# Altium PCB PCB2.PcbDoc (part 2 of 2)
Units mm, origin at the board's own origin, x right, y up, seen from the top; angles counter-clockwise.
Board outline 247 x 102 mm, 2 copper layers (Top Layer, Bottom Layer); 201 components, 195 nets, 868 pads, 143 vias.
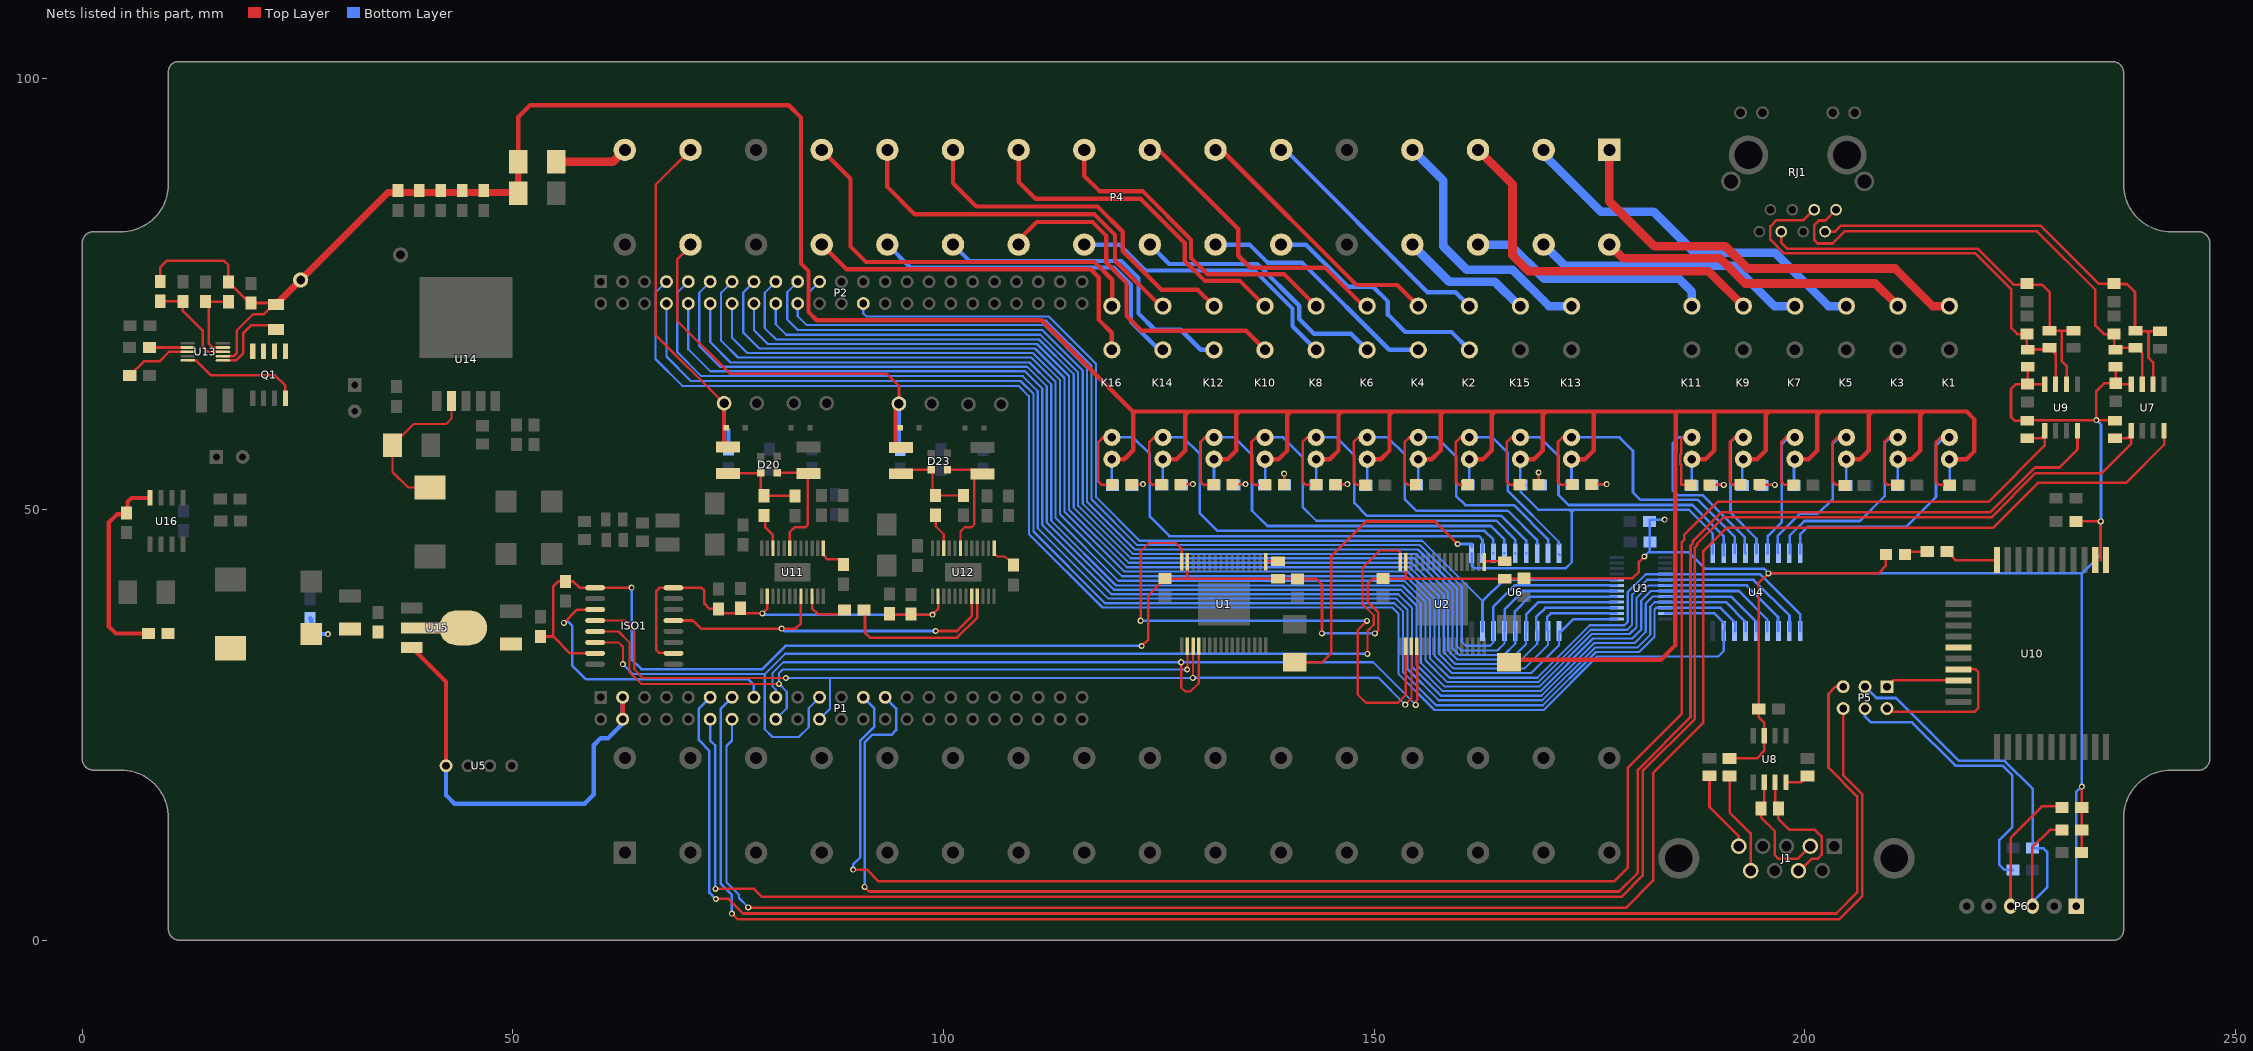
[diagram p2: the nets of this part, all layers, seen from the top]

## Via types
v1: diameter 0.7, hole 0.4, Top Layer to Bottom Layer, 143 vias

## Nets (pads, with @x,y where several pads share a name; then routed paths per layer and width w, separated by ;. In a path a pad name is that pad's centre, name@x,y a point inside that pad or via, vN(x,y) a via of type N, cw(c..) or ccw(c..) an arc to the next point about the centre after c; other vN are vias at no path point) (continued)
NetD10_1: D10.1 R10.1 | length 2.6
  Top Layer w0.3: D10.1@145.503,52.887 145.566,52.95 v1(146.89,52.95)
  Bottom Layer w0.3: R10.1@145.73,52.82 145.86,52.95 v1(146.89,52.95)
NetD11_1: D11.1 R11.2 | length 3.3
  Top Layer w0.3: D11.1@194.733,52.887 194.76,52.86 v1(196.51,52.86)
  Bottom Layer w0.3: R11.2@195.016,52.81 195.066,52.86 v1(196.51,52.86)
NetD12_1: D12.1 R12.1 | length 2.8
  Top Layer w0.3: D12.1@139.503,52.907 139.546,52.95 139.53,52.966 v1(139.53,54.17)
  Bottom Layer w0.3: v1(139.53,54.17) 139.53,52.89 R12.1@139.58,52.84 R12.1@139.69,52.95
NetD13_1: D13.1 R13.2 | length 3.1
  Top Layer w0.3: D13.1@188.903,52.867 188.91,52.86 v1(190.58,52.86)
  Bottom Layer w0.3: R13.2@189.146,52.81 189.196,52.86 v1(190.58,52.86)
NetD14_1: D14.1 R14.1 | length 2.9
  Top Layer w0.3: D14.1@133.553,52.907 133.596,52.95 v1(135.05,52.95)
  Bottom Layer w0.3: R14.1@133.69,52.83 133.81,52.95 v1(135.05,52.95)
NetD15_1: D15.1 R15.2 | length 3.5
  Top Layer w0.3: D15.1@175.243,52.907 175.286,52.95 v1(176.99,52.95)
  Bottom Layer w0.3: R15.2@175.276,52.88 175.346,52.95 v1(176.99,52.95)
NetD16_1: D16.1 R16.1 | length 2.6
  Top Layer w0.3: D16.1@127.503,52.927 127.526,52.95 v1(128.94,52.95)
  Bottom Layer w0.3: R16.1@127.81,52.8 127.96,52.95 v1(128.94,52.95)
NetD17_1: D17.1 R17.2 | length 3.2
  Top Layer w0.3: v1(169.08,54.3) 169.08,52.91 D17.1@169.083,52.907 D17.1@169.126,52.95
  Bottom Layer w0.3: v1(169.08,54.3) 169.08,53.046 R17.2@169.296,52.83 R17.2@169.416,52.95
NetD18_1: D18.1 R18.1 | length 2.7
  Top Layer w0.3: D18.1@121.843,52.907 121.886,52.95 v1(123.15,52.95) ; D18.1@121.863,52.87 D18.1@121.863,52.907
  Bottom Layer w0.3: R18.1@121.86,52.82 121.86,52.87 121.94,52.95 v1(123.15,52.95)
NetD19_2: D19.2 R35.2 | length 3
  Top Layer w0.3: D19.2@211.46,44.5 212.07,45.11 R35.2@214.204,45.11
NetD20_2: D20.2 FB1.1 R36.2 R37.2 | length 10.3
  Top Layer w0.3: FB1.1@74.98,54.206 78.716,54.206 D20.2@78.78,54.27 78.78,51.966 R36.2@79.15,51.596 82.72,51.596 R37.2@82.75,51.566
NetD20_3: D20.3 R40.1 U11.19 | length 14
  Top Layer w0.3: D20.3@80.68,54.27 84.236,54.27 R40.1@84.3,54.206 84.25,54.156 84.25,48.24 83.95,47.94 82.71,47.94 82.135,47.365 U11.19@82.135,45.506
NetD23_2: D23.2 FB2.1 R41.2 R42.2 | length 10.4
  Top Layer w0.254: FB2.1@95.05,54.156 95.524,54.63 D23.2@98.56,54.63 98.73,54.46 98.73,51.626 R42.2@102.31,51.626
NetD23_3: D23.3 R44.1 U12.19 | length 14.3
  Top Layer w0.254: D23.3@100.46,54.63 104.006,54.63 R44.1@104.5,54.136 ; U12.19@101.965,45.506 101.965,47.455 102.45,47.94 103.24,47.94 103.55,48.25 103.55,53.58 R44.1@104.17,54.2
NetD28_2: D28.2 L2.1 U14.2 | length 18.4
  Top Layer w0.254: L2.1@40.37,52.55 37.83,52.55 36.02,54.36 D28.2@36.02,57.48 38.48,59.94 42.27,59.94 42.855,60.525 U14.2@42.855,62.599
NetJ1_2: J1.2 R24.2 U8.6 | length 14.2
  Top Layer w0.3: U8.6@195.276,18.33 195.276,15.642 R24.2@194.914,15.28 194.914,14.246 196.5,12.66 196.5,9.89 196.95,9.44 199.156,9.44 J1.2@200.636,10.92
NetJ1_5: J1.5 R26.2 | length 9.6
  Top Layer w0.3: R26.2@188.91,19.094 188.92,19.084 188.92,15.44 192.326,12.034 J1.5@192.326,10.92
NetJ1_7: J1.7 R24.1 U8.7 | length 15.9
  Top Layer w0.3: U8.7@196.546,18.33 196.546,15.628 R24.1@196.92,15.254 ; R24.1@196.946,15.28 R24.1@196.92,15.254 ; J1.7@199.251,8.08 199.42,8.08 200.78,9.44 201.46,9.44 201.94,9.92 201.94,12.05 201.19,12.8 198.2,12.8 196.92,14.08 R24.1@196.92,15.254
NetJ1_9: J1.9 R25.1 | length 12
  Top Layer w0.3: R25.1@191.26,19.084 191.26,14.85 193.711,12.399 J1.9@193.711,8.08
NetQ1_4: Q1.4 U13.10 | length 14
  Top Layer w0.3: U13.10@12.23,67.31 13.21,67.31 14.94,65.58 22.4,65.58 23.58,64.4 23.58,62.964 Q1.4@23.594,62.95
NetR1_2: R1.2 U1.17 | length 1.5
  Top Layer w0.3: U1.17@137.41,43.93 137.46,43.98 R1.2@138.84,43.98
NetR2_2: R2.2 U2.17 | length 2.4
  Top Layer w0.3: U2.17@162.76,43.91 162.83,43.98 R2.2@165.15,43.98
NetR20_1: R20.1 U8.8 | length 2.8
  Top Layer w0.3: U8.8@197.816,18.33 199.546,18.33 R20.1@200.3,19.084
NetR35_1: R35.1 U10.11 | length 6.2
  Top Layer w0.3: R35.1@216.49,45.11 217.466,44.134 U10.11@222.28,44.134
NetR36_1: R36.1 U11.22 | length 4.2
  Top Layer w0.3: R36.1@79.15,49.31 79.29,49.17 79.29,47.95 80.184,47.056 U11.22@80.184,45.506
NetR39_2: R39.2 U11.13 | length 3.3
  Top Layer w0.3: U11.13@86.036,45.506 86.036,44.704 86.49,44.25 87.82,44.25 R39.2@88.2,43.87
NetR41_1: R41.1 U12.22 | length 4.2
  Top Layer w0.254: R41.1@99.04,49.34 99.1,49.28 99.1,48.06 100.014,47.146 U12.22@100.014,45.506
NetR43_2: R43.2 U12.13 | length 3.4
  Top Layer w0.254: U12.13@105.866,45.506 105.866,44.924 106.23,44.56 107.096,44.56 R43.2@108.11,43.546
NetR46_1: R46.1 R49.2 U13.4 | length 9.3
  Top Layer w0.3: R49.2@14.28,74.154 14.69,73.744 14.69,69.25 15.13,68.81 U13.4@16.33,68.81 ; R49.2@14.56,74.05 14.64,74.13 R46.1@16.96,74.13
NetR47_1: R47.1 R50.2 U13.3 | length 11.4
  Top Layer w0.3: R47.1@9.05,74.18 9.066,74.164 R50.2@11.68,74.164 11.68,73.05 13.99,70.74 13.99,68.9 14.58,68.31 U13.3@16.33,68.31
NetR48_2: R48.2 U13.8 | length 7.9
  Top Layer w0.3: R48.2@5.504,65.56 7.154,67.21 8.94,67.21 10.04,68.31 U13.8@12.23,68.31
NetR51_2: R51.2 U13.7 | length 4.4
  Top Layer w0.3: R51.2@7.786,68.81 U13.7@12.23,68.81
NetR54_1: R54.1 R55.1 U16.4 | length 23.7
  Top Layer w0.5: R54.1@7.68,35.6 3.9,35.6 3.08,36.42 3.08,48.49 4.03,49.44 4.98,49.44 5.26,49.72 5.26,50.89 5.72,51.35 U16.4@7.876,51.35
NetU1_32: U1.32 U2.2 | length 62.3
  Top Layer w0.254: v1@122.87,37.1 v1@122.89,37.12 ; v1@122.89,37.16 122.89,45.17 123.82,46.1 126.99,46.1 127.66,45.43 U1.32@127.66,43.93 ; v1(149.157,37.087) 148.09,36.02 148.09,28.51 149.04,27.56 152.75,27.56 153.66,28.47 U2.2@153.66,34.11
  Bottom Layer w0.254: v1@122.87,37.1 122.883,37.087 v1(149.157,37.087)
  other v1: 122.87,37.09
O5V_ISO: C20.1 C21.1 C31.1 C32.1 ISO1.10 ISO1.16 U11.2 U12.2 | length 53.1
  Top Layer w0.3: ISO1.10@68.64,33.305 68.595,33.35 66.98,33.35 66.65,33.68 66.65,40.54 67.02,40.91 ISO1.16@68.655,40.91 ; ISO1.16@68.64,40.925 ISO1.16@68.655,40.91 ; U11.2@79.532,39.944 79.532,38.522 v1(78.96,37.95) 74.38,37.95 C21.1@73.86,38.47 72.84,38.47 72.23,39.08 72.23,40.599 71.919,40.91 70.97,40.91 ISO1.16@68.655,40.91 ; C31.1@93.72,37.9 93.82,37.8 v1(98.71,37.8) 99.362,38.452 U12.2@99.362,39.944
  Bottom Layer w0.3: v1(78.96,37.95) 79.11,37.8 v1(98.71,37.8)
OUT_C\S\: ISO1.3 P1.15 | length 33.5
  Top Layer w0.3: v1(55.92,36.85) 57.455,38.385 ISO1.3@59.54,38.385
  Bottom Layer w0.3: v1(55.92,36.85) 56.03,36.96 56.43,36.96 56.91,36.48 56.91,31.86 58.45,30.32 77.3,30.32 77.978,29.642 P1.15@77.978,28.198
OUT_PIN0: K1.1 P4.1 | length 50.5
  Top Layer w1: P4.1@177.292,91.76 177.292,85.788 182.5,80.58 190.76,80.58 193.36,77.98 210.47,77.98 214.828,73.622 K1.1@216.774,73.622
OUT_PIN1: K3.1 P4.2 | length 36.5
  Top Layer w1: P4.2@177.292,80.76 178.862,79.19 190.12,79.19 193.06,76.25 208.167,76.25 K3.1@210.795,73.622
OUT_PIN2: K5.1 P4.3 | length 43
  Bottom Layer w1: P4.3@169.672,91.76 169.672,91.228 176.32,84.58 182.44,84.58 187.2,79.82 196.54,79.82 202.738,73.622 K5.1@204.816,73.622
OUT_PIN3: K7.1 P4.4 | length 32.1
  Bottom Layer w1: P4.4@169.672,80.76 172.112,78.32 191.75,78.32 196.448,73.622 K7.1@198.837,73.622
OUT_PIN4: K9.1 P4.5 | length 43.1
  Top Layer w1: P4.5@162.052,91.76 166.05,87.762 166.05,79.53 167.9,77.68 188.801,77.68 K9.1@192.859,73.622
OUT_PIN5: K11.1 P4.6 | length 28.8
  Bottom Layer w1: P4.6@162.052,80.76 165.77,80.76 169.73,76.8 185.37,76.8 186.88,75.29 K11.1@186.88,73.622
OUT_PIN6: K13.1 P4.7 | length 30.4
  Bottom Layer w1: P4.7@154.432,91.76 158,88.192 158,80.58 160.74,77.84 166.06,77.84 170.278,73.622 K13.1@172.898,73.622
OUT_PIN7: K15.1 P4.8 | length 15.7
  Bottom Layer w1: P4.8@154.25,80.92 158.71,76.46 164,76.46 166.838,73.622 K15.1@166.969,73.622
OUT_PIN8: K2.1 P4.11 | length 30.6
  Bottom Layer w0.5: P4.11@138.47,91.67 139.75,91.67 156.19,75.23 159.431,75.23 K2.1@161.039,73.622 ; P4.11@139.192,91.76 P4.11@139.7,91.76
OUT_PIN9: K2.2 P4.12 | length 27.8
  Bottom Layer w0.5: P4.12@139.192,80.76 142.04,80.76 146.93,75.87 149.86,75.87 151.58,74.15 151.58,72.63 153.6,70.61 158.971,70.61 K2.2@161.039,68.542
OUT_PIN10: K4.1 P4.13 | length 31.1
  Top Layer w0.5: P4.13@131.572,91.76 131.852,91.48 132.52,91.48 147.93,76.07 152.662,76.07 K4.1@155.11,73.622
OUT_PIN11: K4.2 P4.14 | length 28.6
  Bottom Layer w0.5: P4.14@131.572,80.76 135.53,80.76 137.62,78.67 141.61,78.67 151.738,68.542 K4.2@155.11,68.542
OUT_PIN12: K6.1 P4.15 | length 34.6
  Top Layer w0.5: P4.15@123.952,91.76 125.02,91.76 134.22,82.56 134.22,79.47 135.602,78.088 144.272,78.088 148.738,73.622 K6.1@149.18,73.622
OUT_PIN13: K6.2 P4.16 | length 31.2
  Bottom Layer w0.5: P4.16@123.952,80.76 126.198,78.514 136.456,78.514 141.3,73.67 141.3,72.13 143.01,70.42 147.302,70.42 K6.2@149.18,68.542
OUT_PIN14: K8.1 P4.17 | length 37.4
  Top Layer w0.5: P4.17@116.332,91.76 116.332,88.728 118.09,86.97 123.08,86.97 128.73,81.32 128.73,79.206 130.602,77.334 139.539,77.334 K8.1@143.251,73.622
OUT_PIN15: K8.2 P4.18 | length 33.2
  Bottom Layer w0.5: P4.18@116.332,80.76 120.43,80.76 123.43,77.76 136.11,77.76 140.52,73.35 140.52,71.273 K8.2@143.251,68.542
OUT_PIN16: K10.1 P4.19 | length 39.5
  Top Layer w0.5: P4.19@108.712,91.76 108.712,88.068 110.71,86.07 122.88,86.07 128.01,80.94 128.01,78.86 130.29,76.58 134.363,76.58 K10.1@137.321,73.622
OUT_PIN17: K10.2 P4.20 | length 40.2
  Top Layer w0.5: P4.20@108.712,80.76 108.712,81.282 110.82,83.39 117.28,83.39 118.9,81.77 118.9,78.65 121.24,76.31 121.24,72.5 122.99,70.75 135.113,70.75 K10.2@137.321,68.542
OUT_PIN18: K12.1 P4.21 | length 41.6
  Top Layer w0.5: P4.21@101.092,91.76 101.092,87.878 103.796,85.174 117.876,85.174 120.8,82.25 120.8,80.02 125.3,75.52 129.494,75.52 K12.1@131.392,73.622 131.508,73.622 K12.1@131.59,73.54
OUT_PIN19: K12.2 P4.22 | length 37.8
  Bottom Layer w0.5: P4.22@101.092,80.76 102.998,78.854 120.666,78.854 122.63,76.89 122.63,72.76 124.52,70.87 127.53,70.87 129.858,68.542 K12.2@131.392,68.542
OUT_PIN20: K14.1 P4.23 | length 43.8
  Top Layer w0.5: P4.23@93.472,91.76 93.472,87.458 96.66,84.27 117.53,84.27 119.91,81.89 119.91,78.88 125.168,73.622 K14.1@125.462,73.622
OUT_PIN21: K14.2 P4.24 | length 39.6
  Bottom Layer w0.5: P4.24@93.472,80.76 96.132,78.1 119.76,78.1 121.76,76.1 121.76,71.78 124.998,68.542 K14.2@125.462,68.542
OUT_PIN22: K16.1 P4.25 | length 47.7
  Top Layer w0.5: P4.25@85.852,91.76 89.2,88.412 89.2,80.54 91,78.74 117.53,78.74 119.58,76.69 119.58,73.669 K16.1@119.533,73.622
OUT_PIN23: K16.2 P4.26 | length 42.8
  Top Layer w0.5: P4.26@85.852,80.76 88.722,77.89 117.09,77.89 118,76.98 118,72.06 119.533,70.527 K16.2@119.533,68.542
OUT_SIG0: D4.2 K1.3 U4.18 | length 35.6
  Top Layer w0.3: D4.2@216.588,52.867 215.577,52.867 215.204,53.24 215.204,57.85 215.734,58.38 K1.3@216.772,58.38
  Bottom Layer w0.3: U4.18@199.46,44.921 199.45,44.931 199.45,47.13 200.34,48.02 211.78,48.02 215.22,51.46 215.22,57.46 216.142,58.382 K1.3@216.774,58.382
OUT_SIG1: D5.2 K3.3 U4.17 | length 30.9
  Top Layer w0.3: D5.2@210.609,52.867 209.598,52.867 209.225,53.24 209.225,57.85 209.755,58.38 K3.3@210.793,58.38
  Bottom Layer w0.3: U4.17@198.19,44.921 198.24,44.971 198.24,46.97 199.94,48.67 206.37,48.67 209.27,51.57 209.27,57.7 209.952,58.382 K3.3@210.795,58.382
OUT_SIG2: D7.2 K5.3 U4.16 | length 26.5
  Top Layer w0.3: D7.2@204.63,52.867 203.62,52.867 203.247,53.24 203.247,57.85 203.777,58.38 K5.3@204.814,58.38
  Bottom Layer w0.3: U4.16@196.92,44.921 196.87,44.971 196.87,46.97 199.39,49.49 201.49,49.49 203.25,51.25 203.25,57.69 203.942,58.382 K5.3@204.816,58.382
OUT_SIG3: D9.2 K7.3 U4.15 | length 23.1
  Top Layer w0.3: D9.2@198.651,52.867 197.641,52.867 197.268,53.24 197.268,57.85 197.798,58.38 K7.3@198.835,58.38
  Bottom Layer w0.3: U4.15@195.65,44.921 195.7,44.971 195.7,46.94 197.33,48.57 197.33,57.59 198.122,58.382 K7.3@198.837,58.382
OUT_SIG4: D11.2 K9.3 U4.14 | length 23.8
  Top Layer w0.3: D11.2@192.672,52.867 191.662,52.867 191.289,53.24 191.289,57.85 191.819,58.38 K9.3@192.857,58.38
  Bottom Layer w0.3: K9.3@192.859,58.382 191.902,58.382 191.36,57.84 191.36,49.63 194.38,46.61 U4.14@194.38,44.921
OUT_SIG5: D13.2 K11.3 U4.13 | length 28.2
  Top Layer w0.3: D13.2@186.693,52.867 185.683,52.867 185.62,52.93 185.62,55.192 185.53,55.283 185.53,56.401 185.62,56.492 185.62,58.16 185.84,58.38 186.878,58.38 K11.3@186.88,58.382
  Bottom Layer w0.3: K11.3@186.88,58.382 185.342,58.382 184.65,57.69 184.65,52.22 185.19,51.68 188.09,51.68 193.04,46.73 193.04,44.991 U4.13@193.11,44.921
OUT_SIG6: D15.2 K13.3 U4.12 | length 36.4
  Top Layer w0.3: D15.2@172.714,52.869 171.703,52.869 171.33,53.242 171.33,57.852 171.86,58.382 K13.3@172.898,58.382
  Bottom Layer w0.3: K13.3@172.898,58.382 178.478,58.382 180.04,56.82 180.04,51.99 180.91,51.12 187.57,51.12 191.86,46.83 191.86,44.941 U4.12@191.84,44.921
OUT_SIG7: D17.2 K15.3 U4.11 | length 41.2
  Top Layer w0.3: D17.2@166.784,52.869 165.774,52.869 165.401,53.242 165.401,57.852 165.931,58.382 K15.3@166.969,58.382
  Bottom Layer w0.3: K15.3@166.969,58.382 169.248,58.382 171.39,56.24 171.39,51.71 172.57,50.53 186.94,50.53 190.58,46.89 190.58,44.74 U4.11@190.62,44.7
OUT_SIG8: D3.2 K2.3 U6.18 | length 26.3
  Top Layer w0.3: D3.2@160.855,52.869 159.844,52.869 159.471,53.242 159.471,57.852 160.001,58.382 K2.3@161.039,58.382
  Bottom Layer w0.3: K2.3@161.039,58.382 163.718,58.382 165.49,56.61 165.49,52.19 171.42,46.26 ; U6.18@171.43,44.81 U6.18@171.53,44.71 ; U6.18@171.43,45.99 171.43,46.27
OUT_SIG9: D6.2 K4.3 U6.17 | length 31
  Top Layer w0.3: D6.2@154.925,52.869 153.915,52.869 153.542,53.242 153.542,57.852 154.072,58.382 K4.3@155.11,58.382
  Bottom Layer w0.3: K4.3@155.11,58.382 157.288,58.382 159.51,56.16 159.51,51.57 160.57,50.51 166.2,50.51 170.19,46.52 170.19,46.101
OUT_SIG10: D8.2 K6.3 U6.16 | length 36.1
  Top Layer w0.3: D8.2@148.996,52.869 147.986,52.869 147.613,53.242 147.613,57.852 148.143,58.382 K6.3@149.18,58.382
  Bottom Layer w0.3: K6.3@149.18,58.382 151.558,58.382 153.56,56.38 153.56,51.19 154.87,49.88 165.5,49.88 168.92,46.46 U6.16@168.92,46.01
OUT_SIG11: D10.2 K8.3 U6.15 | length 40.8
  Top Layer w0.3: D10.2@143.066,52.869 142.056,52.869 141.683,53.242 141.683,57.852 142.213,58.382 K8.3@143.251,58.382
  Bottom Layer w0.3: K8.3@143.251,58.382 145.598,58.382 147.68,56.3 147.68,50.74 149.12,49.3 164.74,49.3 167.63,46.41 167.63,46.121 ; U6.15@167.63,44.941 U6.15@167.65,44.921
OUT_SIG12: D12.2 K10.3 U6.14 | length 45.7
  Top Layer w0.3: D12.2@137.137,52.869 136.127,52.869 135.754,53.242 135.754,57.852 136.284,58.382 K10.3@137.321,58.382
  Bottom Layer w0.3: K10.3@137.321,58.382 139.418,58.382 141.68,56.12 141.68,50.288 143.268,48.7 164.18,48.7 166.39,46.49 166.39,46.111 ; U6.14@166.38,44.921 U6.14@166.39,44.931
OUT_SIG13: D14.2 K12.3 U6.13 | length 50.8
  Top Layer w0.3: D14.2@131.207,52.869 130.197,52.869 129.824,53.242 129.824,57.852 130.354,58.382 K12.3@131.392,58.382
  Bottom Layer w0.3: K12.3@131.392,58.382 133.778,58.382 135.81,56.35 135.81,49.86 137.58,48.09 163.54,48.09 165.1,46.53 165.1,46.111 ; U6.13@165.1,44.931 U6.13@165.11,44.921
OUT_SIG14: D16.2 K14.3 U6.12 | length 55.7
  Top Layer w0.3: D16.2@125.278,52.869 124.268,52.869 123.895,53.242 123.895,57.852 124.425,58.382 K14.3@125.462,58.382
  Bottom Layer w0.3: K14.3@125.462,58.382 127.818,58.382 129.72,56.48 129.72,49.6 131.8,47.52 162.81,47.52 163.83,46.5 163.83,46.111 ; U6.12@163.83,44.931 U6.12@163.84,44.921
OUT_SIG15: D18.2 K16.3 U6.11 | length 61.7
  Top Layer w0.3: D18.2@119.349,52.869 118.338,52.869 117.965,53.242 117.965,57.852 118.495,58.382 K16.3@119.533,58.382
  Bottom Layer w0.3: K16.3@119.533,58.382 122.008,58.382 123.94,56.45 123.94,49.18 126.21,46.91 162.15,46.91 162.57,46.49 U6.11@162.57,44.921
PA0: P2.14 U3.4 U4.1 | length 168.3
  Bottom Layer w0.254: P2.14@75.438,73.914 75.438,69.952 77.21,68.18 110.35,68.18 113.53,65 113.53,49.43 120.7,42.26 153.68,42.26 156.46,39.48 156.46,32.75 158.73,30.48 168.926,30.48 175.016,36.57 179.06,36.57 179.43,36.94 179.43,40.42 181.505,42.495 U3.4@183.769,42.495
  Bottom Layer w0.3: U3.4@183.769,42.495 194.765,42.495 199.47,37.79 199.47,35.889 U4.1@199.46,35.879
PA1: P2.13 U3.5 U4.2 | length 171.6
  Bottom Layer w0.254: P2.13@75.438,76.454 74.17,75.186 74.17,69.6 76.12,67.65 110.16,67.65 113.01,64.8 113.01,49.01 120.29,41.73 153.49,41.73 155.94,39.28 155.94,32.49 158.47,29.96 169.048,29.96 175.138,36.05 179.38,36.05 179.94,36.61 179.94,40.1 181.685,41.845 U3.5@183.769,41.845
  Bottom Layer w0.3: U3.5@183.769,41.845 194.055,41.845 198.21,37.69 198.21,35.899 U4.2@198.19,35.879
PA2: P2.12 U3.6 U4.3 | length 168.4
  Bottom Layer w0.254: P2.12@72.898,73.914 72.898,69.452 75.27,67.08 109.98,67.08 112.5,64.56 112.5,48.71 120.02,41.19 153.29,41.19 155.41,39.07 155.41,32.21 158.18,29.44 169.17,29.44 175.27,35.54 179.64,35.54 180.46,36.36 180.46,39.77 181.885,41.195 U3.6@183.769,41.195
  Bottom Layer w0.3: U3.6@183.769,41.195 193.225,41.195 196.88,37.54 196.88,35.919 U4.3@196.92,35.879
PA3: P2.11 U3.7 U4.4 | length 171.4
  Bottom Layer w0.254: P2.11@72.898,76.454 71.63,75.186 71.63,68.98 74.04,66.57 109.7,66.57 111.97,64.3 111.97,48.49 119.78,40.68 153.07,40.68 154.9,38.85 154.9,31.98 157.96,28.92 169.292,28.92 175.392,35.02 179.94,35.02 181,36.08 181,39.43 182.115,40.545 U3.7@183.769,40.545
  Bottom Layer w0.3: U3.7@183.769,40.545 192.335,40.545 195.63,37.25 195.63,35.899 U4.4@195.65,35.879
PA4: P2.10 U3.8 U4.5 | length 168.3
  Bottom Layer w0.254: P2.10@70.358,73.914 70.358,68.612 72.92,66.05 109.46,66.05 111.46,64.05 111.46,48.2 119.49,40.17 152.8,40.17 154.38,38.59 154.38,31.76 157.75,28.39 169.404,28.39 175.504,34.49 180.21,34.49 181.52,35.8 181.52,39.09 182.325,39.895 U3.8@183.769,39.895
  Bottom Layer w0.3: U3.8@183.769,39.895 191.435,39.895 194.38,36.95 U4.5@194.38,35.879
PA5: P2.9 U3.9 U4.6 | length 171.5
  Bottom Layer w0.254: P2.9@70.358,76.454 69.07,75.166 69.07,68.3 71.88,65.49 109.2,65.49 110.94,63.75 110.94,47.83 119.11,39.66 152.55,39.66 153.86,38.35 153.86,31.48 157.478,27.862 169.518,27.862 175.626,33.97 180.53,33.97 182.04,35.48 182.04,38.72 182.565,39.245 U3.9@183.769,39.245
  Bottom Layer w0.3: U3.9@183.769,39.245 190.835,39.245 193.12,36.96 193.12,35.889 U4.6@193.11,35.879
PA6: P2.8 U3.10 U4.7 | length 168.6
  Bottom Layer w0.254: P2.8@67.818,73.76 67.818,67.762 70.65,64.93 108.94,64.93 110.43,63.44 110.43,47.44 118.74,39.13 152.34,39.13 153.35,38.12 153.35,31.1 157.17,27.28 169.578,27.28 175.748,33.45 180.78,33.45 182.548,35.218 182.548,38.408 182.735,38.595 U3.10@183.769,38.595
  Bottom Layer w0.3: U3.10@183.769,38.595 190.205,38.595 191.91,36.89 191.91,35.949 U4.7@191.84,35.879
PA7: P2.7 U3.11 U4.8 | length 177.3
  Bottom Layer w0.254: 66.55,75.226 66.55,67.47 69.66,64.36 108.69,64.36 109.9,63.15 109.9,47.17 118.45,38.62 152.08,38.62 152.83,37.87 152.83,30.89 156.99,26.73 169.67,26.73 175.87,32.93 189.93,32.93 190.57,33.57 U4.8@190.57,35.879 ; 66.59,75.226 P2.7@67.818,76.454
  Bottom Layer w0.3: U3.11@183.769,37.945 189.495,37.945 190.68,36.76 190.68,35.989 U4.8@190.57,35.879
PB0: P2.15 U3.13 U6.1 | length 140.9
  Bottom Layer w0.254: P2.15@77.978,76.454 76.73,75.206 76.73,70.55 78.59,68.69 110.62,68.69 114.04,65.27 114.04,49.74 120.98,42.8 153.86,42.8 157,39.66 157,33.01 158.99,31.02 168.23,31.02 171.46,34.25 U6.1@171.46,35.879
  Bottom Layer w0.3: U6.1@171.46,35.59 173.14,37.27 178.106,37.27 U3.13@178.131,37.295
PB1: P2.16 U3.14 U6.2 | length 137.2
  Bottom Layer w0.254: P2.16@77.978,73.914 77.978,70.812 79.57,69.22 110.85,69.22 114.57,65.5 114.57,49.99 121.25,43.31 154.12,43.31 157.51,39.92 157.51,33.25 159.23,31.53 167.42,31.53 170.19,34.3 U6.2@170.19,35.879
  Bottom Layer w0.3: U6.2@170.19,35.879 170.07,35.999 170.07,37.52 170.495,37.945 U3.14@178.131,37.945
PB2: P2.17 U3.15 U6.3 | length 138.6
  Bottom Layer w0.254: P2.17@80.518,76.454 79.24,75.176 79.24,71.06 80.56,69.74 111.07,69.74 115.11,65.7 115.11,50.22 121.498,43.832 154.328,43.832 158.06,40.1 158.06,33.42 159.43,32.05 166.56,32.05 168.92,34.41 U6.3@168.92,35.879
  Bottom Layer w0.3: U6.3@168.92,35.879 168.83,35.969 168.83,37.56 169.865,38.595 U3.15@178.131,38.595
PB3: P2.18 U3.16 U6.4 | length 134
  Bottom Layer w0.254: P2.18@80.518,73.914 80.518,71.502 81.72,70.3 111.23,70.3 115.62,65.91 115.62,50.44 121.72,44.34 154.61,44.34 158.58,40.37 158.58,33.62 159.62,32.58 165.84,32.58 167.63,34.37 U6.4@167.63,35.899
  Bottom Layer w0.3: U6.4@167.63,35.879 167.63,37.79 169.085,39.245 U3.16@178.131,39.245 ; U6.4@167.63,35.899 U6.4@167.65,35.879
PB4: P2.19 U3.17 U6.5 | length 135.5
  Bottom Layer w0.254: P2.19@83.058,76.454 81.84,75.236 81.84,72.06 83.04,70.86 111.43,70.86 116.15,66.14 116.15,50.66 121.955,44.855 154.855,44.855 159.1,40.61 159.1,33.87 159.86,33.11 165.07,33.11 166.38,34.42 U6.5@166.38,35.879
  Bottom Layer w0.3: U6.5@166.32,35.879 166.32,38.16 168.055,39.895 U3.17@178.131,39.895 ; U6.5@166.32,35.939 U6.5@166.38,35.879
PB5: P2.20 U3.18 U6.6 | length 131
  Bottom Layer w0.254: P2.20@83.058,73.914 83.058,72.452 84.1,71.41 111.68,71.41 116.66,66.43 116.66,50.91 122.207,45.363 155.077,45.363 159.61,40.83 159.61,34.13 160.09,33.65 164.3,33.65 165.14,34.49 U6.6@165.14,36.07
  Bottom Layer w0.3: U6.6@165.11,35.879 165.14,35.909 165.14,38.42 167.265,40.545 U3.18@178.131,40.545
PB6: P2.21 U3.19 U6.7 | length 132.1
  Bottom Layer w0.254: P2.21@85.598,76.454 84.34,75.196 84.34,72.96 85.38,71.92 111.93,71.92 117.17,66.68 117.17,51.18 122.479,45.871 155.309,45.871 160.16,41.02 160.16,34.65 160.62,34.19 163.45,34.19 163.81,34.55 U6.7@163.81,35.909
  Bottom Layer w0.3: U6.7@163.81,35.879 163.81,38.71 166.295,41.195 U3.19@178.131,41.195 ; U6.7@163.81,35.909 U6.7@163.84,35.879
PB7: P2.26 U3.20 U6.8 | length 116
  Bottom Layer w0.254: P2.26@90.678,73.914 90.678,72.762 91.01,72.43 112.17,72.43 117.71,66.89 117.71,51.42 122.751,46.379 155.561,46.379 162.58,39.36 162.58,39.35
  Bottom Layer w0.3: U6.8@162.57,35.879 162.57,39.35 ; 162.58,39.36 165.065,41.845 U3.20@178.131,41.845
PWM_TIM1_CH3: U10.16
RS485A1: C9.2 R22.1 R23.1 RJ1.2 U7.6 | length 53.8
  Top Layer w0.3: RJ1.2@202.34,82.27 203.5,82.27 204.2,82.97 227.33,82.97 234.07,76.23 C9.2@235.9,76.23 235.94,76.19 237.38,76.19 238.33,75.24 R22.1@238.33,70.68 ; R22.1@238.23,70.58 R22.1@238.33,70.68 ; 239.67,70.66 239.89,70.44 ; 240.11,70.66 239.89,70.44 ; U7.6@240.434,64.54 240.434,67.086 239.89,67.63 239.89,70.44 ; R23.1@241.24,70.68 R22.1@238.33,70.68
RS485A2: C12.2 R29.1 R30.1 RJ1.6 U9.6 | length 49
  Top Layer w0.3: RJ1.6@197.26,82.27 197.26,80.97 197.93,80.3 220.04,80.3 224.23,76.11 227.53,76.11 228.41,75.23 R29.1@228.41,70.78 R30.1@231.2,70.78 ; C12.2@225.69,76.23 C12.2@225.81,76.11 ; 229.63,70.78 229.81,70.6 ; 229.99,70.78 229.81,70.6 ; U9.6@230.384,64.54 230.384,66.666 229.81,67.24 229.81,70.6
RS485B1: C8.2 R21.1 R22.2 RJ1.1 U7.7 | length 56.7
  Top Layer w0.3: RJ1.1@203.62,84.81 202.37,83.56 201.62,83.56 201.09,83.03 201.09,81.29 201.49,80.89 203.21,80.89 204.62,82.3 226.95,82.3 233.73,75.52 233.73,71.35 234.71,70.37 C8.2@235.9,70.37 235.9,68.75 R21.1@236.07,68.58 236.27,68.78 R22.2@238.39,68.78 ; R22.2@238.51,68.8 239.164,68.146 U7.7@239.164,64.54
RS485B2: C11.2 R28.1 R29.2 RJ1.3 U9.7 | length 53.3
  Top Layer w0.3: RJ1.3@201.08,84.81 199.86,83.59 196.71,83.59 196,82.88 196,81.33 197.58,79.75 219.78,79.75 223.97,75.56 223.97,71.08 224.68,70.37 C11.2@225.77,70.37 225.77,68.69 R28.1@225.88,68.58 228.21,68.58 R29.2@228.41,68.78 229.114,68.076 U9.7@229.114,64.54
SCLK_AO: ISO1.13 U11.8 U12.8 | length 43.8
  Top Layer w0.3: ISO1.13@68.64,37.115 70.905,37.115 71.85,36.17 82.81,36.17 83.433,36.793 U11.8@83.433,39.944 ; v1(99.07,35.9) 101.563,35.9 103.263,37.6 U12.8@103.263,39.944
  Bottom Layer w0.3: v1@81.19,36.19 81.48,35.9 v1(99.07,35.9)
  other v1: 81.2,36.17
SDI2: R38.1 U12.9 | length 19.4
  Top Layer w0.3: R38.1@90.78,38.33 90.88,38.23 90.88,35.68 91.431,35.129 101.576,35.129 103.913,37.467 U12.9@103.913,39.944
SDO1: R38.2 U11.10 | length 5.7
  Top Layer w0.3: U11.10@84.733,39.944 84.733,38.527 85.41,37.85 88.014,37.85 R38.2@88.494,38.33
SPI0_CS0: P1.17 U1.4 U2.4 | length 97
  Top Layer w0.254: v1(127.59,32.27) 127.59,29.32 128.045,28.865 128.655,28.865 129.627,29.837 129.627,34.113 U1.4@129.61,34.13 ; v1(154.82,27.32) 154.82,27.74 154.987,27.907 154.987,34.083 U2.4@154.96,34.11
  Bottom Layer w0.254: P1.17@80.518,28.198 80.518,29.092 80.123,29.487 80.123,30.993 81.4,32.27 v1(127.59,32.27) 149.87,32.27 v1(154.82,27.32)
SPI0_MISO: ISO1.6 P1.21 U2.32 | length 126.9
  Top Layer w0.254: ISO1.6@59.54,34.575 62.235,34.575 62.77,34.04 v1(62.77,32.05) ; v1(149.21,33.25) 149.21,35.9 149.94,36.63 149.94,37.71 148.63,39.02 148.63,43.24 150.63,45.24 152.81,45.24 153.01,45.04 U2.32@153.01,43.91
  Bottom Layer w0.254: v1(62.77,32.05) 63.93,30.89 79.24,30.89 ; P1.21@85.598,28.198 84.34,26.94 84.34,24.74 83.2,23.6 80.13,23.6 79.24,24.49 79.24,30.89 ; v1(149.21,33.25) 81.6,33.25 79.24,30.89
SPI0_MOSI: ISO1.5 P1.18 U1.2 | length 82.3
  Top Layer w0.254: ISO1.5@59.54,35.845 62.255,35.845 63.52,34.58 63.52,31.13 64.89,29.76 v1@80.74,29.76 ; v1(128.28,31.43) 128.29,31.43 128.31,31.45 U1.2@128.31,34.13
  Bottom Layer w0.254: P1.18@80.518,25.658 81.8,26.94 81.8,28.85 v1(80.89,29.76) 80.89,30.99 81.33,31.43 v1(128.28,31.43)
SPI0_SCLK: ISO1.4 P1.22 U1.3 U2.3 | length 116.8
  Top Layer w0.254: ISO1.4@59.54,37.115 62.975,37.115 64.09,36 64.09,31.44 65.08,30.45 v1@81.69,30.45 ; v1@128.96,30.46 U1.3@128.96,34.13 ; v1(153.6,27.35) 154.31,28.06 U2.3@154.31,34.11
  Bottom Layer w0.254: v1(81.69,30.44) 81.7,30.45 86.82,30.45 86.82,26.88 P1.22@85.598,25.658 ; 86.83,30.45 128.95,30.45 v1@128.96,30.46 ; v1(128.95,30.46) v1@128.96,30.46 ; v1(153.6,27.35) 150.483,30.467 128.967,30.467 v1@128.96,30.46
UART2_RX-O: P1.11 P5.5 | length 185.5
  Top Layer w0.3: v1@73.72,4.79 75.03,4.79 76.72,3.1 203.64,3.1 206.06,5.52 206.06,16.71 202.74,20.03 202.74,28.59 203.58,29.43 P5.5@204.44,29.43
  Bottom Layer w0.3: P1.11@72.898,28.198 71.58,26.88 71.58,23.22 72.81,21.99 72.81,5.52 v1@73.54,4.79 ; v1(73.55,4.78) v1@73.54,4.79 ; v1@73.72,4.79 v1@73.54,4.79
UART2_TX-O: P1.13 P5.6 | length 181.5
  Top Layer w0.3: v1@75.435,3.095 76.1,2.43 203.98,2.43 206.68,5.13 206.68,16.93 204.44,19.17 P5.6@204.44,26.89
  Bottom Layer w0.3: v1(75.42,3.08) 75.42,5.26 74.13,6.55 74.13,26.89 P1.13@75.438,28.198
UART3_RX: P1.12 R19.1 U7.1 | length 228.8
  Top Layer w0.3: v1@73.72,5.97 78.01,5.97 78.94,5.04 178.7,5.04 181.17,7.51 181.17,19.639 187.22,25.689 187.22,45.601 187.49,45.871 187.49,46.03 190.56,49.1 221.646,49.1 226.776,54.23 234.47,54.23 237.894,57.654 U7.1@237.894,59.14 ; R19.1@235.99,58.3 237.48,58.3 U7.1@237.92,58.74
  Bottom Layer w0.3: P1.12@72.898,25.658 72.898,23.21 73.49,22.618 73.49,6 v1(73.52,5.97)
UART3_TX: P1.14 U7.4 | length 230.4
  Top Layer w0.3: v1@77.3,3.79 179.26,3.79 182.374,6.904 182.374,19.428 188.22,25.274 188.22,45.187 190.903,47.87 221.83,47.87 227.06,53.1 237.28,53.1 241.704,57.524 U7.4@241.704,59.14
  Bottom Layer w0.254: P1.14@75.438,25.658 75.438,23.188 74.79,22.54 74.79,6.74 76.24,5.29 76.24,4.895 v1(77.32,3.815)
UART4_RX: P1.25 R27.1 U9.1 | length 204.1
  Top Layer w0.3: v1(89.49,8.19) 91.083,8.19 92.453,6.82 177.84,6.82 179.41,8.39 179.41,20 185.72,26.31 185.72,46.222 185.99,46.492 185.99,47.02 189.87,50.9 221.324,50.9 227.844,57.419 U9.1@227.844,59.14 ; R27.1@225.81,58.3 227.49,58.3 U9.1@227.83,58.64
  Bottom Layer w0.3: v1(89.49,8.19) 89.49,8.78 90.34,9.63 90.34,23.187 91.96,24.807 91.96,26.916 P1.25@90.678,28.198
UART4_TX: P1.27 U9.4 | length 208.7
  Top Layer w0.3: v1(90.83,6.18) 91.36,5.65 178.43,5.65 180.61,7.83 180.61,19.786 186.72,25.896 186.72,45.808 186.99,46.078 186.99,46.35 190.33,49.69 221.529,49.69 226.719,54.88 229.56,54.88 231.654,56.974 U9.4@231.654,59.14
  Bottom Layer w0.3: v1(90.83,6.18) 90.84,6.19 90.84,22.98 91.7,23.84 93.94,23.84 94.5,24.4 94.5,26.916 P1.27@93.218,28.198
UART_RXD: C16.2 P5.3 P6.3 R33.2 | length 51.3
  Top Layer w0.3: P6.3@226.42,3.95 226.39,3.98 226.39,10.77 228.43,12.81 R33.2@229.864,12.81
  Bottom Layer w0.3: P5.3@206.98,29.43 208.29,28.12 210.58,28.12 214.51,24.19 214.52,24.19 217.89,20.82 223.177,20.82 226.466,17.531 C16.2@226.466,10.67 ; P6.3@226.42,3.95 226.42,4.41 228.13,6.12 228.13,10.24 227.7,10.67 C16.2@226.466,10.67 ; C16.2@226.436,10.7 C16.2@226.466,10.67
UART_RXD1: P5.1 U10.19 | length 8.6
  Top Layer w0.3: P5.1@209.52,29.43 210.262,30.172 U10.19@217.843,30.172
UART_TXD: C15.2 P5.4 P6.4 R32.2 | length 53.2
  Top Layer w0.3: P6.4@223.88,3.95 223.88,11.89 227.53,15.54 229.754,15.54 R32.2@229.864,15.43
  Bottom Layer w0.3: P5.4@206.98,26.89 206.98,25.98 207.67,25.29 212.46,25.29 217.49,20.26 222.953,20.26 224.08,19.133 224.08,13.15 222.58,11.65 222.58,8.74 223.13,8.19 C15.2@223.93,8.19 ; P6.4@223.88,3.95 223.88,7.906 C15.2@224.144,8.17
UART_TXD1: P5.2 U10.18 | length 17.6
  Top Layer w0.3: P5.2@209.52,26.89 209.9,26.51 219.71,26.51 220.15,26.95 220.15,31.12 219.828,31.442 U10.18@217.843,31.442
V3_3D: C1.2 C2.2 C3.2 C4.2 C5.2 C6.2 C7.1 C10.1 C13.1 C30.1 C60.1 CA1.1 D19.1 ISO1.1 ISO1.7 P6.1 R1.1 R2.1 R19.2 R21.2 R25.2 R27.2 R28.2 R31.2 R32.1 R33.1 R34.2 U1.31 U2.31 U7.8 U8.3 U9.8 U10.1 U10.2 U15.2 | length 378
  Top Layer w0.3: C60.1@53.2,35.26 54.69,35.26 ; ISO1.7@59.54,33.305 56.645,33.305 54.69,35.26 ; v1@63.78,40.87 63.725,40.87 63.67,40.925 ISO1.1@59.54,40.925 57.735,40.925 57,41.66 C30.1@56.1,41.66 55.25,41.66 54.69,41.1 54.69,35.26 ; v1(123,34.16) 123.77,34.93 123.77,40.05 C3.2@125.7,41.98 128.31,41.98 ; U1.31@128.31,43.93 128.31,41.98 ; C1.2@141.07,41.98 R1.1@138.84,41.98 128.31,41.98 ; C1.2@141.11,41.94 143.3,41.94 143.93,41.31 v1(143.93,35.62) ; v1(150.07,35.63) 150.47,36.03 150.47,38.06 149.23,39.3 149.23,41.38 149.83,41.98 C4.2@151.04,41.98 R2.1@165.15,41.98 C2.2@167.33,41.98 ; 153.66,41.98 U2.31@153.66,43.91 ; C2.2@167.38,42.03 180.01,42.03 180.72,42.74 180.72,43.91 v1(181.36,44.55) ; R25.2@191.26,21.116 194.416,21.116 195.276,21.976 U8.3@195.276,23.73 195.276,25.264 194.64,25.9 C7.1@194.64,26.84 194.64,41.46 v1(195.77,42.59) 208.52,42.59 209.407,43.477 D19.1@209.407,44.803 ; C13.1@225.88,64.59 R28.2@225.88,66.58 ; U9.8@227.844,64.54 227.814,64.57 C13.1@225.86,64.57 224.52,64.57 223.93,63.98 223.93,60.76 224.39,60.3 R27.2@225.81,60.3 225.9,60.39 v1(233.85,60.39) ; R31.2@231.456,48.63 v1(234.35,48.63) 234.35,44.13 ; R34.2@232.126,10.17 R32.1@232.126,15.406 ; R32.1@232.15,15.43 v1(232.15,17.84) ; R19.2@235.99,60.3 235.9,60.39 v1(233.85,60.39) ; R21.2@236.07,66.58 236.07,64.69 C10.1@236.09,64.67 ; U7.8@237.894,64.54 236.22,64.54 C10.1@236.09,64.67 ; v1(233.85,60.39) 233.85,63.76 234.76,64.67 C10.1@236.09,64.67
  Bottom Layer w0.3: v1(63.78,40.93) 63.78,32.6 64.9,31.48 78.95,31.48 81.64,34.17 v1@123,34.17 ; v1(143.93,35.62) 150.06,35.62 v1(150.07,35.63) ; v1(181.36,44.55) 181.87,45.06 186.46,45.06 188.39,43.13 195.23,43.13 v1(195.77,42.59) 232.15,42.59 ; 181.966,45.156 C5.2@181.966,48.61 ; C5.2@182.006,48.83 v1(183.72,48.83) ; P6.1@231.5,3.95 231.5,17.19 v1(232.15,17.84) 232.15,42.59 ; v1(233.85,60.39) 234.38,59.86 234.38,48.66 v1(234.35,48.63) 234.35,44.79 232.15,42.59
V24_IN: D26.1 P4.31 | length 8.5
  Top Layer w1: D26.1@55.033,90.36 61.592,90.36 P4.31@62.992,91.76
VCC24V: C38.2 C39.2 C40.2 C41.2 C42.2 C44.1 D1.1 D2.1 D26.2 D27.2 K1.4 K2.4 K3.4 K4.4 K5.4 K6.4 K7.4 K8.4 K9.4 K10.4 K11.4 K12.4 K13.4 K14.4 K15.4 K16.4 R3.1 R4.1 R5.1 R6.1 R7.1 R8.2 R9.1 R10.2 R11.1 R12.2 R13.1 R14.2 R15.1 R16.2 R17.1 R18.2 R45.1 R46.2 R47.2 TP1.1 U4.10 U6.10 U13.2 | length 571.7
  Top Layer w0.3: R47.2@9.05,76.466 9.06,76.476 9.06,78.15 9.79,78.88 16.47,78.88 16.96,78.39 R46.2@16.96,76.416 19.396,73.98 22.32,73.98 R45.1@22.5,73.8 ; U13.2@16.33,67.81 17.6,67.81 17.93,68.14 17.93,70.76 19.85,72.68 21.09,72.68 R45.1@22.01,73.6 ; D1.1@140.89,32.49 141.12,32.26 143.95,32.26 145.03,33.34 145.03,44.58 149.06,48.61 157.06,48.61 v1(159.67,46) ; D2.1@166.26,32.8 D2.1@166.28,32.78
  Top Layer w0.5: D26.2@50.613,90.36 50.613,95.573 51.98,96.94 82.02,96.94 83.44,95.52 83.44,78.56 84.32,77.68 84.32,72.93 85.27,71.98 111.37,71.98 121.97,61.38 ; K16.4@119.533,55.842 120.972,55.842 122.02,56.89 122.02,61.33 121.97,61.38 ; K14.4@125.462,55.842 127.039,55.842 128.057,56.86 128.057,60.98 128.457,61.38 ; K12.4@131.392,55.842 132.969,55.842 133.987,56.86 133.987,60.98 134.387,61.38 ; K10.4@137.321,55.842 138.898,55.842 139.916,56.86 139.916,60.98 140.316,61.38 ; K8.4@143.251,55.842 144.828,55.842 145.846,56.86 145.846,60.98 146.246,61.38 ; K6.4@149.18,55.842 150.757,55.842 151.775,56.86 151.775,60.98 152.175,61.38 ; K4.4@155.11,55.842 156.687,55.842 157.705,56.86 157.705,60.98 158.105,61.38 ; K2.4@161.039,55.842 162.616,55.842 163.634,56.86 163.634,60.98 164.034,61.38 ; D2.1@166.07,32.57 183.28,32.57 184.93,34.22 184.93,56.65 185.02,56.74 185.02,61.38 195.853,61.38 ; K15.4@166.969,55.842 168.545,55.842 169.563,56.86 169.563,60.98 169.963,61.38 ; K13.4@172.898,55.842 174.475,55.842 175.493,56.86 175.493,61.38 ; 184.61,61.38 175.493,61.38 ; K11.4@186.88,55.842 188.457,55.842 189.475,56.86 189.475,61.38 ; K9.4@192.859,55.842 194.435,55.842 195.453,56.86 195.453,60.98 195.853,61.38 ; K7.4@198.837,55.842 200.414,55.842 201.432,56.86 201.432,60.98 201.832,61.38 ; K5.4@204.816,55.842 206.393,55.842 207.411,56.86 207.411,60.98 207.811,61.38 ; K3.4@210.795,55.842 212.372,55.842 213.39,56.86 213.39,60.98 213.79,61.38 ; K1.4@216.774,55.842 216.786,55.83 218.75,55.83 219.65,56.73 219.65,60.52 218.79,61.38 213.79,61.38 ; 121.97,61.38 128.457,61.38 ; 128.457,61.38 134.387,61.38 ; 134.387,61.38 140.316,61.38 ; 140.316,61.38 146.246,61.38 ; 146.246,61.38 152.175,61.38 ; 152.175,61.38 158.105,61.38 ; 158.105,61.38 164.034,61.38 ; 164.034,61.38 169.963,61.38 ; 169.963,61.38 175.493,61.38 ; 195.853,61.38 201.832,61.38 ; 201.832,61.38 207.811,61.38 ; 207.811,61.38 213.79,61.38
  Top Layer w0.8: R45.1@22.5,73.8 22.5,73.81 TP1.1@25.35,76.66 35.48,86.79 50.613,86.79 D26.2@50.613,90.36
  Bottom Layer w0.3: K16.4@119.533,55.842 119.533,52.82 R18.2@119.734,52.82 ; R16.2@125.462,52.978 K14.4@125.462,55.842 ; K12.4@131.392,55.842 131.392,52.82 R14.2@131.68,52.82 ; K10.4@137.321,55.842 137.321,52.82 R12.2@137.652,52.82 ; K8.4@143.251,55.842 143.251,52.82 R10.2@143.625,52.82 ; K6.4@149.18,55.842 149.18,52.82 R8.2@149.598,52.82 ; K4.4@155.11,55.842 155.11,52.82 R6.1@155.571,52.82 ; v1(159.67,46) 161.3,46 U6.10@161.3,45.64 ; K2.4@161.039,55.842 161.039,52.82 R4.1@161.544,52.82 ; U6.10@161.3,44.921 161.3,43.5 161.64,43.16 172.21,43.16 172.93,43.88 172.93,49.656 ; K15.4@166.969,55.842 166.969,52.82 R17.1@167.517,52.82 ; R17.1@167.01,52.83 167.01,52.02 169.054,49.976 172.61,49.976 ; K13.4@172.898,55.842 172.898,52.82 R15.1@173.489,52.82 ; K11.4@186.88,55.842 186.88,52.82 R13.1@187.07,52.82 ; U4.10@189.3,44.921 189.3,47.21 186.534,49.976 173.25,49.976 ; R11.1@192.73,52.81 192.73,55.713 K9.4@192.859,55.842 ; R9.1@198.73,52.81 K7.4@198.73,56.15 ; R7.1@204.79,52.81 204.79,55.816 K5.4@204.816,55.842 ; R5.1@210.79,52.81 210.79,55.837 K3.4@210.795,55.842 ; K1.4@216.774,55.842 216.8,55.816 R3.1@216.8,52.81 ; 172.61,49.976 173.25,49.976 ; 172.61,49.976 172.93,49.656 ; 172.93,49.656 173.25,49.976
VDD_5V: C58.1 C59.2 C61.1 CA2.1 L4.2 P1.3 P1.4 R54.2 U5.1 U15.3 | length 55.9
  Top Layer w0.5: U15.3@38.246,33.971 42.22,29.998 U5.1@42.22,20.236 ; P1.4@62.738,25.658 P1.3@62.738,28.198
  Bottom Layer w0.5: C59.2@26.45,37.364 26.57,37.244 26.57,36.34 27.37,35.54 v1(28.53,35.54) ; U5.1@42.234,20.25 42.22,20.236 42.22,16.84 43.22,15.84 58.32,15.84 59.38,16.9 59.38,22.64 60.2,23.46 61.06,23.46 62.738,25.138 P1.4@62.738,25.658 P1.3@62.738,28.198
VIN_D: Q1.5 Q1.6 Q1.7 Q1.8 R45.2 U13.1 | length 9.4
  Top Layer w0.3: U13.1@16.33,67.31 17.83,67.31 18.7,68.18 18.7,70.52 19.57,71.39 22.01,71.39 R45.2@22.5,70.9
VOUT1: C23.1 D21.1 FB1.2 J2.1 P4.29 | length 45.3
  Top Layer w0.3: P4.29@70.612,91.76 66.56,87.708 66.56,70.29 J2.1@74.51,62.34
  Top Layer w0.5: J2.1@74.51,62.34 74.51,57.98 FB1.2@75.25,57.24
  Bottom Layer w0.5: J2.1@74.51,62.34 74.51,59.76 75.02,59.25 C23.1@75.02,57.04
VOUT2: C34.1 D24.1 FB2.2 J4.1 P4.30 | length 51.3
  Top Layer w0.3: P4.30@70.612,80.76 70.612,80.592 69.07,79.05 69.07,71.92 75.2,65.79 93.39,65.79 94.82,64.36 J4.1@94.82,62.29
  Top Layer w0.5: J4.1@94.82,62.29 94.423,61.893 94.423,57.831 FB2.2@95.05,57.204
  Bottom Layer w0.5: J4.1@94.82,62.29 94.82,57.13 C34.1@94.97,56.98
pads on no net: J1.1 J1.4 J1.8 J1.10 J1.11 P1.5 P1.6 P1.7 P1.8 P1.9 P1.10 P1.28 P1.29 P1.30 P1.31 P1.32 P1.33 P1.34 P1.35 P1.36 P1.37 P1.38 P1.39 P1.40 P1.42 P2.3 P2.4 P2.5 P2.6 P2.22 P2.23 P2.24 P2.25 P2.27 P2.28 P2.29 P2.30 P2.31 P2.32 P2.33 P2.34 P2.35 P2.36 P2.37 P2.38 P2.39 P2.40 P2.41 P2.42 P2.43 P2.44 P2.45 P2.46 RJ1. RJ1.4 RJ1.5 RJ1.7 RJ1.8 RJ1.9 RJ1.10 RJ1.11 RJ1.12 U1.18 U1.19 U1.20 U1.21 U1.22 U1.23 U1.30 U2.18 U2.19 U2.20 U2.21 U2.22 U2.23 U2.30 U3.1 U8.5 U10.3 U10.4 U10.5 U10.6 U10.8 U10.9 U10.10 U10.12 U10.13 U10.14 U10.17 U10.20 U10.21 U10.22 U10.23 U10.24 U10.25 U10.26 U10.27 U10.28 U10.29 U11.3 U11.16 U11.20 U12.3 U12.16 U12.20 U16.2 U16.3 U16.5
copper on no net:
  other v1: 139.33,27.28 140.22,27.28 141.11,27.28 139.33,28.15 140.22,28.15 141.11,28.15 139.33,29.02 140.22,29.02 141.11,29.02 204.68,37.78 205.57,37.78 206.46,37.78 204.68,38.65 205.57,38.65 206.46,38.65 204.68,39.52 205.57,39.52 206.46,39.52 240.74,49.18 241.63,49.18 242.52,49.18 240.74,50.05 241.63,50.05 242.52,50.05 240.74,50.92 241.63,50.92 242.52,50.92 181.6,52.83 182.49,52.83 183.38,52.83 181.6,53.7 182.49,53.7 183.38,53.7 181.6,54.57 182.49,54.57 183.38,54.57 77.54,57.04

## Polygon pours and split planes (outlines as drawn)
GND_SIG on Top Layer "Top Layer-No Net" (solid, remove dead copper, pour order 1006): 62.24,49.19 62.24,69.82 63.5,71.08 109.16,71.08 111.77,68.47 111.77,33.43 110.38,32.04 71.25,32.04 70.39,31.18 65.89,31.18 65.18,31.89 65.18,42.4 64.31,43.27 63.19,43.27 62.22,44.24 62.22,49.17
DGND on Top Layer "Top Layer-No Net" (solid, remove dead copper, pour order 1008): 62.13,0.567 236.21,0.567 236.833,1.19 236.833,16.69 240.263,20.12 246.273,20.12 246.823,20.67 246.823,22.35 246.533,22.64 225.523,22.64 223.953,24.21 220.443,24.21 219.673,24.98 219.673,41.28 222.293,43.9 246.143,43.9 246.143,43.97 246.823,44.65 246.823,81.19 246.163,81.85 240.163,81.85 236.893,85.12 236.893,100.21 235.643,101.46 64.143,101.46 57.203,94.52 57.203,5.495
NetD28_2 on Top Layer "Top Layer-No Net" (solid, remove dead copper, pour order 1004): 42.34,63.71 42.34,60.5 41.66,59.82 39.68,59.82 39.34,59.48 39.34,55.65 38.1,54.41 38.1,50.83 38.44,50.49 44.47,50.49 44.88,50.9 44.88,59.47 43.4,60.95 43.4,63.6 43.29,63.71
NetC56_2 on Top Layer "Top Layer-No Net" (solid, remove dead copper, pour order 1003): 11.38,47.16 11.38,44.31 10.42,43.35 9.24,43.35 8.61,42.72 8.61,38.61 8.88,38.34 12.14,38.34 14.22,40.42 22.26,40.42 22.89,41.05 22.89,46.6 21.95,47.54 11.76,47.54 11.38,47.16
DGND on Top Layer "Top Layer-No Net" (solid, remove dead copper, pour order 1007): 61.555,71.538 61.555,43.798 62.635,42.718 62.635,1.138 61.925,0.428 12.235,0.428 10.935,1.728 10.935,16.858 7.425,20.368 2.175,20.368 0.695,21.848 0.695,80.428 1.655,81.388 7.215,81.388 10.835,85.008 10.835,100.318 12.005,101.488 64.105,101.488 65.375,100.218 65.375,74.038 64.155,72.818 62.835,72.818
V3_3D on Top Layer "Top Layer-No Net" (solid, remove dead copper, pour order 1000): 41.44,32.86 53.67,32.86 53.94,33.13 53.94,35.97 53.78,36.13 48.61,36.13 45.64,39.1 41.28,39.1 40.68,38.5 40.68,33.62
+15V on Top Layer "Top Layer-No Net" (solid, remove dead copper, pour order 1001): 35,43.08 55.97,43.08 57.96,45.07 61.2,45.07 61.36,45.23 61.36,47.28 61.22,47.42 34.99,47.42 34.55,46.98 34.55,43.53
VDD_5V on Top Layer "Top Layer-No Net" (solid, remove dead copper, pour order 1002): 39.49,32.35 38.69,33.15 36.95,33.15 25.51,33.15 22.92,30.56 10.14,30.56 9.29,31.41 9.29,36.27 9.6,36.58 10.1,37.08 22.33,37.08 32.95,37.08 33.44,36.59 35.33,36.59 35.7,36.22 35.7,35.16 36.1,34.76 39.59,34.76 39.74,34.61 39.74,32.6 39.49,32.35
VIN_D on Top Layer "Top Layer-No Net" (solid, remove dead copper, pour order 1005): 19.38,67.17 24.19,67.17 24.38,67.36 24.38,70.59 23.43,71.54 22.81,71.54 21.57,70.3 19.74,70.3 19.23,69.79 19.23,67.32 19.38,67.17
GND_SIG on Bottom Layer "Top Layer-No Net" (solid, remove dead copper, pour order 1009): 65.17,34.13 65.17,42.36 63.55,43.98 62.22,45.31 62.22,49.7 62.22,61.89 63.8,63.47 107.05,63.47 108.64,61.88 108.64,34.18 106.7,32.24 67.06,32.24 65.17,34.13
DGND on Bottom Layer "Top Layer-No Net" (solid, remove dead copper, pour order 1010): 61.656,0.708 235.756,0.708 236.449,1.4 236.449,16.92 239.019,19.49 239.789,20.26 245.219,20.26 245.849,20.26 246.549,20.96 246.549,22.31 246.089,22.77 225.079,22.77 223.789,24.06 223.479,24.37 219.989,24.37 219.189,25.17 219.189,25.98 219.189,41.42 221.069,43.3 221.799,44.03 237.239,44.03 245.639,44.03 246.339,44.73 246.339,81.39 245.749,81.98 239.779,81.98 236.819,84.94 236.409,85.35 236.409,94.11 236.409,100.38 235.399,101.39 235.189,101.6 63.709,101.6 61.139,99.03 61.139,71.61 61.139,1.225 61.656,0.708
DGND on Bottom Layer "Top Layer-No Net" (solid, remove dead copper, pour order 1011): 61.52,71.45 61.52,43.8 62.63,42.69 62.63,1.14 62.03,0.54 12.1,0.54 10.93,1.71 10.93,16.84 7.5,20.27 2.13,20.27 0.76,21.64 0.76,80.5 1.68,81.42 7.19,81.42 10.8,85.03 10.8,100.2 12.04,101.44 64.09,101.44 65.32,100.21 65.32,73.99 63.82,72.49 62.56,72.49 61.52,71.45

## Keep-outs
Top Overlay:
  circle w0.254: c33.138,73.054 r4
Keep-Out Layer:
  circle w0.254: c181.138,29.054 r1.7
  circle w0.254: c33.138,29.054 r1.7
  circle w0.254: c33.138,73.054 r1.7
  circle w0.254: c181.138,73.054 r1.7
  circle w0.3: c29,14 r2
  circle w0.3: c218,14 r2
  circle w0.3: c218,89 r2
  circle w0.3: c29,89 r2
  lines w0.254: 0,21.02 ccw(c1.27,21.02) 1.27,19.75 4.5,19.75 cw(c4.5,14.25) 10,14.25 10,1.27 ccw(c11.27,1.27) 11.27,0 12.54,0 235.857,0 ccw(c235.857,1.143) 237,1.143 237,14.243 cw(c242.5,14.243) 242.5,19.743 245.73,19.743 ccw(c245.73,21.013) 247,21.013 247,22.371 247,80.156 247,80.98 ccw(c245.73,80.98) 245.73,82.25 242.5,82.25 cw(c242.5,87.75) 237,87.75 237,100.73 ccw(c235.73,100.73) 235.73,102 234.46,102 11.143,102 ccw(c11.143,100.857) 10,100.857 10,87.757 cw(c4.5,87.757) 4.5,82.257 1.27,82.257 ccw(c1.27,80.987) 0,80.987 0,79.629 0,21.844 0,21.02

## Other copper
Top Layer:
  rectangle: 138.33,26.34 142.13,29.94
  rectangle: 203.87,36.02 208.47,40.95
  rectangle: 180.7,51.3 184.02,56.06
  rectangle: 239.66,47.75 244.05,52.19
  rectangle net V3_3D: 233.36,42.63 235.33,45.63
Bottom Layer:
  rectangle: 138.33,26.34 142.13,29.94
  rectangle: 24.66,49.67 32.88,56.32
  rectangle: 203.58,36.16 208.07,40.41
  rectangle: 180.78,52.05 184.05,55.74
  rectangle: 239.98,47.77 243.85,52.09

## Silkscreen, mask and mechanical layers (free items; w line width, h text height)
Top Overlay:
  circle w0.254: c181.138,29.054 r4
  circle w0.254: c181.138,73.054 r4
  circle w0.254: c33.138,29.054 r4
  circle w0.254: c218,14 r4
  circle w0.254: c218,89 r4
  circle w0.254: c29,14 r4
  circle w0.254: c29,89 r4

## Dimensions
0,79.629 to 247,80.156 on Top Overlay
11.143,102 to 12.54,0 on Top Overlay

## Text inside footprints (layer, text, board x,y; h text height)
J1: Top Overlay "1" at 205.18,13.2 h1; Top Overlay "5" at 188.99,12.91 h1; Top Overlay "9" at 194.211,4.975 h1 r180; Top Overlay "6" at 202.521,4.975 h1 r180
L2: Top Overlay "GS" at 40.87,47.91 h1 r90
L4: Top Overlay "GS" at 17.73,37.22 h1 r90
P1: Bottom Overlay "2" at 57.658,26.166 h1 r180; Bottom Overlay "1" at 57.658,28.706 h1 r180
P2: Bottom Overlay "2" at 57.658,74.422 h1 r180; Bottom Overlay "1" at 57.658,76.962 h1 r180
P5: Top Overlay "6" at 201.55,26.15 h1; Top Overlay "5" at 201.64,29.2 h1; Top Overlay "2" at 211.55,26.26 h1; Top Overlay "1" at 211.43,29.06 h1